# Altium PCB PCB_Lib.pcbdoc
Units mm, origin at the board's own origin, x right, y up, seen from the top; angles counter-clockwise.
Board outline 90 x 60 mm, 2 copper layers (Top Layer, Bottom Layer); 17 components, 88 nets, 128 pads, 0 vias.
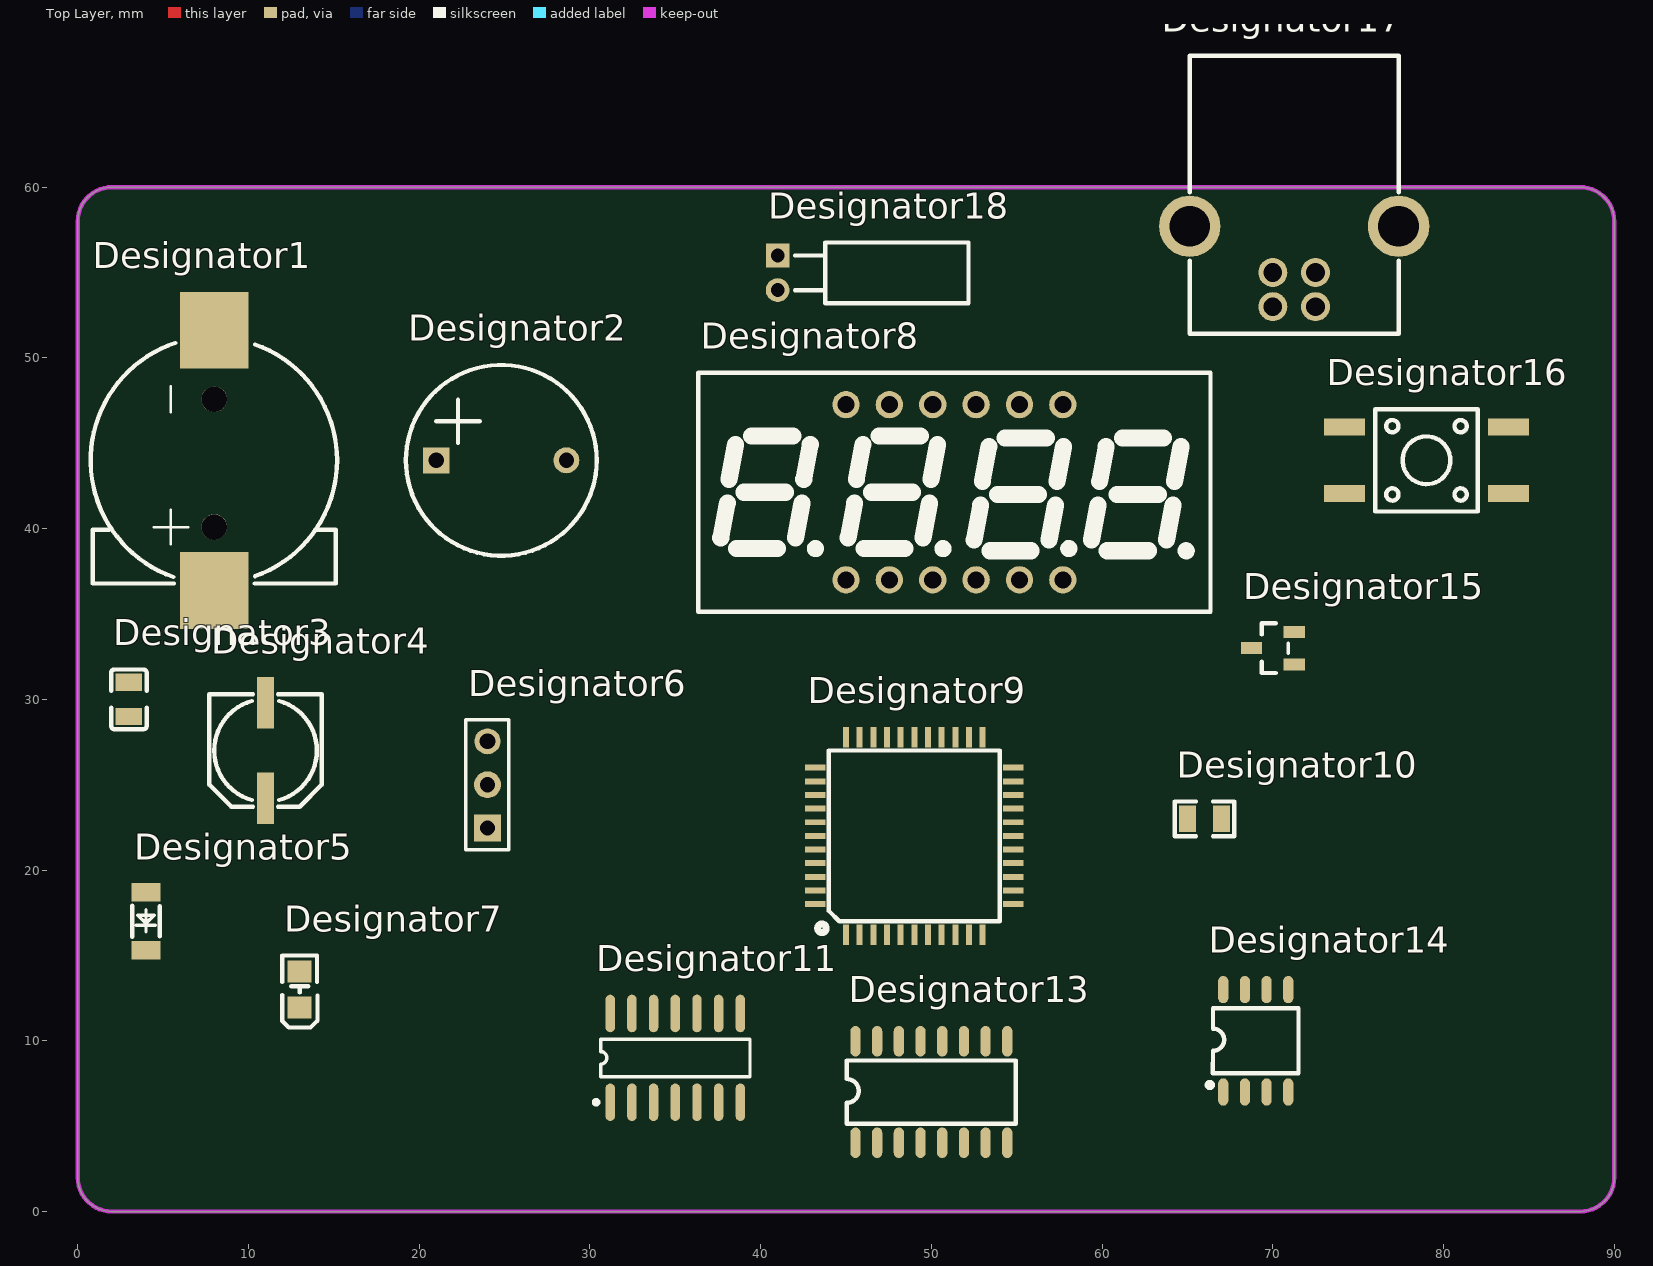
[diagram p0: Top Layer view]
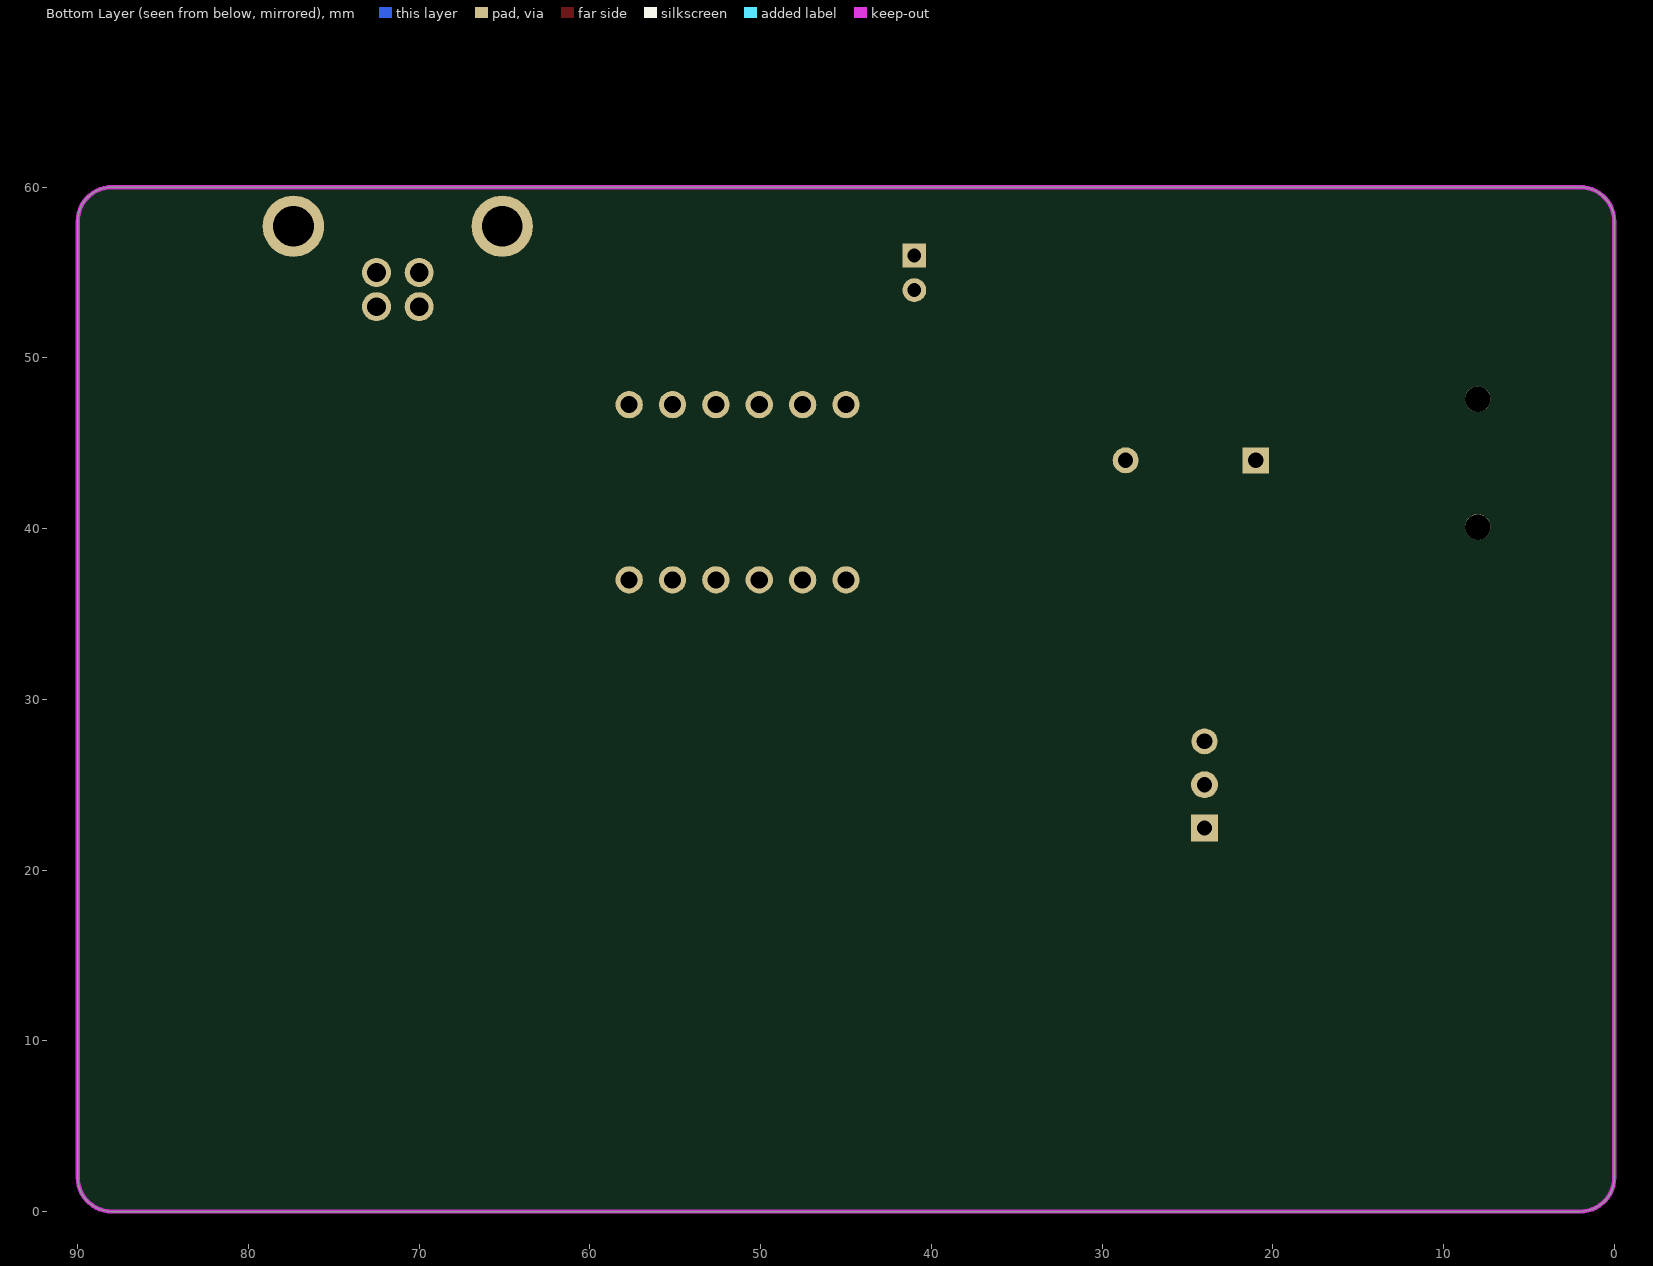
[diagram p1: Bottom Layer view, seen from below]

## Layer stack, top to bottom
Top Solder: solder mask 0.0102, Solder Resist, Dk 3.5
Top Layer: signal copper 0.0356
Dielectric1: dielectric 0.32, FR-4, Dk 4.8
Bottom Layer: signal copper 0.0356
Bottom Solder: solder mask 0.0102, Solder Resist, Dk 3.5

## Board outline
0,1.999 ccw(c2,2) 1.999,0 88.001,0 ccw(c88,2) 90,1.999 90,58 90,58.001 ccw(c88,58) 88.001,60 88,60 2,60 1.999,59.999 ccw(c2,57.999) 0,58

## Design rules (kind name [scope] priority, off if disabled: settings)
AssemblyTestPointUsage [All] p0: scope1count=1 scope1_0_kind=Board scope1_0_value=Board scope2count=1 scope2_0_kind=Board scope2_0_value=Board commentlength=0
AssemblyTestpoint [All] p0: scope1count=1 scope1_0_kind=Board scope1_0_value=Board scope2count=1 scope2_0_kind=Board scope2_0_value=Board commentlength=0
Clearance [All] p0: scope1count=1 scope1_0_kind=Board scope1_0_value=Board scope2count=1 scope2_0_kind=Board scope2_0_value=Board commentlength=0 gap=0.254
Clearance [All] p1: gap=0.254 ignorepadtopadclearanceinfootprint=FALSE except(0: Arc-Hole Track-Hole SMDPad-Hole THPad-Hole Via-Hole Fill-Hole Poly-Hole Region-Hole Text-Hole)
ComponentClearance [All] p0: scope1count=1 scope1_0_kind=Board scope1_0_value=Board scope2count=1 scope2_0_kind=Board scope2_0_value=Board commentlength=0 gap=0.254 collisioncheckmode=3
DiffPairsRouting [All] p0: scope1count=1 scope1_0_kind=Board scope1_0_value=Board scope2count=1 scope2_0_kind=Board scope2_0_value=Board commentlength=0
FabricationTestPointUsage [All] p0: scope1count=1 scope1_0_kind=Board scope1_0_value=Board scope2count=1 scope2_0_kind=Board scope2_0_value=Board commentlength=0 valid=0 allowmultiple=FALSE
FabricationTestpoint [All] p0: scope1count=1 scope1_0_kind=Board scope1_0_value=Board scope2count=1 scope2_0_kind=Board scope2_0_value=Board commentlength=0 side=3 testpointundercomponent=TRUE minsize=1.016 maxsize=2.54 preferedsize=1.524 minholesize=0 maxholesize=1.016 preferedholesize=0.813 testpointgrid=0.025
FanoutControl Fanout_BGA [All] p0 off: scope1count=1 scope1_0_kind=Board scope1_0_value=Board scope2count=1 scope2_0_kind=Board scope2_0_value=Board commentlength=69 // Protel DXP Scope 1 Expression Was: IsBGA   Fanout_BGA (Default Rule)
FanoutControl Fanout_LCC [All] p0 off: scope1count=1 scope1_0_kind=Board scope1_0_value=Board scope2count=1 scope2_0_kind=Board scope2_0_value=Board commentlength=69 // Protel DXP Scope 1 Expression Was: IsLCC   Fanout_LCC (Default Rule)
FanoutControl Fanout_SOIC [All] p0 off: scope1count=1 scope1_0_kind=Board scope1_0_value=Board scope2count=1 scope2_0_kind=Board scope2_0_value=Board commentlength=71 // Protel DXP Scope 1 Expression Was: IsSOIC   Fanout_SOIC (Default Rule)
FanoutControl Fanout_Small [All] p0 off: scope1count=1 scope1_0_kind=Board scope1_0_value=Board scope2count=1 scope2_0_kind=Board scope2_0_value=Board commentlength=84 // Protel DXP Scope 1 Expression Was: (CompPinCount < 5)   Fanout_Small (Default Rule)
FanoutControl Fanout_Default [All] p0: scope1count=1 scope1_0_kind=Board scope1_0_value=Board scope2count=1 scope2_0_kind=Board scope2_0_value=Board commentlength=30 // Fanout_Default (Default Rule)
Height [All] p0: scope1count=1 scope1_0_kind=Board scope1_0_value=Board scope2count=1 scope2_0_kind=Board scope2_0_value=Board commentlength=0
HoleSize [All] p0: scope1count=1 scope1_0_kind=Board scope1_0_value=Board scope2count=1 scope2_0_kind=Board scope2_0_value=Board commentlength=0 absolutevalues=TRUE maxlimit=2.54 minlimit=0.025 maxpercent=80.000 minpercent=20.000
HoleToHoleClearance [All] p0: scope1count=1 scope1_0_kind=Board scope1_0_value=Board scope2count=1 scope2_0_kind=Board scope2_0_value=Board commentlength=0
LayerPairs [All] p0: scope1count=1 scope1_0_kind=Board scope1_0_value=Board scope2count=1 scope2_0_kind=Board scope2_0_value=Board commentlength=0 enforce=TRUE
MinimumSolderMaskSliver [All] p0: scope1count=1 scope1_0_kind=Board scope1_0_value=Board scope2count=1 scope2_0_kind=Board scope2_0_value=Board commentlength=0
NetAntennae [All] p0: scope1count=1 scope1_0_kind=Board scope1_0_value=Board scope2count=1 scope2_0_kind=Board scope2_0_value=Board commentlength=0
PasteMaskExpansion [All] p0: scope1count=1 scope1_0_kind=Board scope1_0_value=Board scope2count=1 scope2_0_kind=Board scope2_0_value=Board commentlength=0 expansion=0
PlaneClearance [All] p0: scope1count=1 scope1_0_kind=Board scope1_0_value=Board scope2count=1 scope2_0_kind=Board scope2_0_value=Board commentlength=0 clearance=0.508
PlaneConnect [All] p0: scope1count=1 scope1_0_kind=Board scope1_0_value=Board scope2count=1 scope2_0_kind=Board scope2_0_value=Board commentlength=0 planeconnectstyle=Relief reliefexpansion=0.508 reliefentries=4 reliefconductorwidth=0.254 reliefairgap=0.254
PolygonConnect [All] p0: scope1count=1 scope1_0_kind=Board scope1_0_value=Board scope2count=1 scope2_0_kind=Board scope2_0_value=Board commentlength=0 connectstyle=Relief reliefconductorwidth=0.254 reliefentries=4 polygonreliefangle="90 Angle"
PolygonConnect [All] p1: connectstyle=Relief reliefconductorwidth=0.254 reliefentries=4 polygonreliefangle="90 Angle" airgapwidth=0.254
RoutingCorners [All] p0: scope1count=1 scope1_0_kind=Board scope1_0_value=Board scope2count=1 scope2_0_kind=Board scope2_0_value=Board commentlength=0 cornerstyle=45-Degree minsetback=2.54 maxsetback=2.54
RoutingLayers [All] p0: scope1count=1 scope1_0_kind=Board scope1_0_value=Board scope2count=1 scope2_0_kind=Board scope2_0_value=Board commentlength=0 top layer=Automatic bottom layer=Automatic
RoutingPriority [All] p0: scope1count=1 scope1_0_kind=Board scope1_0_value=Board scope2count=1 scope2_0_kind=Board scope2_0_value=Board commentlength=0
RoutingTopology [All] p0: scope1count=1 scope1_0_kind=Board scope1_0_value=Board scope2count=1 scope2_0_kind=Board scope2_0_value=Board commentlength=0 topology=Shortest
RoutingVias [All] p0: scope1count=1 scope1_0_kind=Board scope1_0_value=Board scope2count=1 scope2_0_kind=Board scope2_0_value=Board commentlength=0 holewidth=0.711 width=1.27 viastyle="Through Hole" minholewidth=0.711 minwidth=1.27 maxholewidth=0.711 maxwidth=1.27
RoutingVias [All] p1: holewidth=0.711 width=1.27 viastyle="Through Hole" minholewidth=0.711 minwidth=1.27 maxholewidth=0.711 maxwidth=1.27
ShortCircuit [All] p0: scope1count=1 scope1_0_kind=Board scope1_0_value=Board scope2count=1 scope2_0_kind=Board scope2_0_value=Board commentlength=0 allowed=FALSE
SilkToBoardRegionClearance [All] p0 off: scope1count=1 scope1_0_kind=Board scope1_0_value=Board scope2count=1 scope2_0_kind=Board scope2_0_value=Board commentlength=0
SilkToBoardRegionClearance [All] p1 off:
SilkToSilkClearance [All] p0: scope1count=1 scope1_0_kind=Board scope1_0_value=Board scope2count=1 scope2_0_kind=Board scope2_0_value=Board commentlength=0
SilkToSolderMaskClearance [All] p0 off: scope1count=1 scope1_0_kind=Board scope1_0_value=Board scope2count=1 scope2_0_kind=Board scope2_0_value=Board commentlength=44 // Protel DXP Scope 1 Expression Was: IsPad
SolderMaskExpansion [All] p0: scope1count=1 scope1_0_kind=Board scope1_0_value=Board scope2count=1 scope2_0_kind=Board scope2_0_value=Board commentlength=0 expansion=0.102
SolderMaskExpansion [All] p1: expansion=0.102 istentingtop=FALSE
UnRoutedNet [All] p0: scope1count=1 scope1_0_kind=Board scope1_0_value=Board scope2count=1 scope2_0_kind=Board scope2_0_value=Board commentlength=0
UnpouredPolygon [All] p0: scope1count=1 scope1_0_kind=Board scope1_0_value=Board scope2count=1 scope2_0_kind=Board scope2_0_value=Board commentlength=0
Width [All] p0: scope1count=1 scope1_0_kind=Board scope1_0_value=Board scope2count=1 scope2_0_kind=Board scope2_0_value=Board commentlength=0 maxlimit=0.254 minlimit=0.254 preferedwidth=0.254
Width [All] p1: maxlimit=0.254 minlimit=0.254 preferedwidth=0.254
29 further rules are at their usual default settings.

## Components (designator, comment, footprint, x,y, rotation, side; value= is the part's Value field where it differs from the comment)
Designator2 "Comment" BUZZ 21,44 r0 top
Designator3 "Comment" C0805 3,30 r90 top
Designator4 "Comment" CAP 11,27 r90 top
Designator5 "Comment" DIODE 4,17 r90 top
Designator6 "Comment" HDR-F-2.54_1X3 24,25 r90 top
Designator7 "Comment" LED0805 13,13 r90 top
Designator8 "Comment" LED-SEG 45,37 r0 top
Designator9 "Comment" LQFP-44 49,22 r0 top
Designator10 "Comment" R0805 66,23 r0 top
Designator11 "Comment" SO-14 35,9 r0 top
Designator13 "Comment" SOP-16 50,7 r0 top
Designator14 "Comment" SOP-8 69,10 r0 top
Designator15 "Comment" SOT-23-3 70,33 r0 top
Designator16 "Comment" SW-SMD_4P 79,44 r0 top
Designator17 "Comment" USB-B 70,53 r180 top
Designator18 "Comment" XTAL-DT38 41,56 r90 top
? "Comment" BAT-CR1220 8,44 r90 top

## Footprints (in the part's own frame and the unit in brackets; to place one, negate y for a bottom-side part, rotate by r counter-clockwise, add the part's x,y. Pads: shape width x height; smd on the part's side, far side on the other; paste and mask are expansions set on the pad)
BAT-CR1220 [mm]
  rect 4.5x4 smd: 1(-7.62,0) 2(7.62,0)
  round 1.5 hole 1.5 unplated: ""(-3.912,0) ""(3.581,0)
  silkscreen extent -7.22,-7.19 6.87,7.24
BUZZ [mil]
  rect 60x60 hole 35: 1(0,0)
  round 60 hole 35: 2(300,0)
  silkscreen extent -70,-220 370,220
C0805 [mm]
  rect 1x1.55 smd: 1(-1,0) 2(1,0)
  silkscreen extent -1.75,-1.04 1.75,1.04
CAP [mm]
  rect 3x1 smd: 1(-2.8,0) 2(2.8,0)
  silkscreen extent -3.3,-3.3 3.3,3.3
DIODE [mm]
  rect 1.1x1.7 smd: 1(-1.7,0) 2(1.7,0)
  silkscreen extent -0.9,-0.8 0.9,0.8
HDR-F-2.54_1X3 [mil]
  rect 62x62 hole 35: 1(-100,0)
  round 62 hole 35: 2(0,0)
  round 60 hole 36: 3(100,0)
  silkscreen extent -150,-49 150,50
LED0805 [mm]
  rect 1.3x1.4 smd: 1(1.05,0) 2(-1.05,0)
  silkscreen extent -2.22,-1.04 1.99,1.01
LED-SEG [mm]
  round 1.6 hole 1: 1(0,0) 2(2.54,0) 3(5.08,0) 4(7.62,0) 5(10.16,0) 6(12.7,0) 7(12.7,10.26) 8(10.16,10.26) 9(7.62,10.26) 10(5.08,10.26) 11(2.54,10.26) 12(0,10.26)
  silkscreen extent -8.65,-1.87 21.35,12.13
LQFP-44 [mil]
  rect 13.8x47.24 smd: 1(-157.48,-228) 2(-125.98,-228) 3(-94.49,-228) 4(-62.99,-228) 5(-31.5,-228) 6(0,-228) 7(31.5,-228) 8(62.99,-228) 9(94.49,-228) 10(125.98,-228) 11(157.48,-228) 23(157.48,228) 24(125.98,228) 25(94.49,228) 26(62.99,228) 27(31.5,228) 28(0,228) 29(-31.5,228) 30(-62.99,228) 31(-94.49,228) 32(-125.98,228) 33(-157.48,228)
  rect 47.24x13.8 smd: 12(228,-157.48) 13(228,-125.98) 14(228,-94.49) 15(228,-62.99) 16(228,-31.5) 17(228,0) 18(228,31.5) 19(228,62.99) 20(228,94.49) 21(228,125.98) 22(228,157.48) 34(-228,157.48) 35(-228,125.98) 36(-228,94.49) 37(-228,62.99) 38(-228,31.5) 39(-228,0) 40(-228,-31.5) 41(-228,-62.99) 42(-228,-94.49) 43(-228,-125.98) 44(-228,-157.48)
  silkscreen extent -223,-223 197,197
R0805 [mm]
  rect 1x1.55 smd: 1(-1,0) 2(1,0)
  silkscreen extent -1.75,-1.02 1.75,1.02
SO-14 [mm]
  oval 0.55x2.2 smd: 1(-3.81,-2.6) 2(-2.54,-2.6) 3(-1.27,-2.6) 4(0,-2.6) 5(1.27,-2.6) 6(2.54,-2.6) 7(3.81,-2.6) 8(3.81,2.6) 9(2.54,2.6) 10(1.27,2.6) 11(0,2.6) 12(-1.27,2.6) 13(-2.54,2.6) 14(-3.81,2.6)
  silkscreen extent -4.76,-2.72 4.37,1.1
SOP-8 [mm]
  oval 0.6x1.598 smd: 1(-1.905,-3) 2(-0.635,-3) 3(0.635,-3) 4(1.905,-3) 5(1.905,3) 6(0.635,3) 7(-0.635,3) 8(-1.905,3)
  silkscreen extent -2.84,-2.74 2.5,1.9
SOP-16 [mm]
  oval 0.6x1.798 smd: 1(-4.445,-2.972) 2(-3.175,-2.972) 3(-1.905,-2.972) 4(-0.635,-2.972) 5(0.635,-2.972) 6(1.905,-2.972) 7(3.175,-2.972) 8(4.445,-2.972) 9(4.445,2.972) 10(3.175,2.972) 11(1.905,2.972) 12(0.635,2.972) 13(-0.635,2.972) 14(-1.905,2.972) 15(-3.175,2.972) 16(-4.445,2.972)
  silkscreen extent -4.95,-1.85 4.95,1.85
SOT-23-3 [mm]
  rect 1.25x0.7 smd: 1(1.25,-0.95) 2(1.25,0.95) 3(-1.25,0)
  silkscreen extent -0.65,-1.46 0.9,1.46
SW-SMD_4P [mm]
  rect 2.4x1 smd: 1(-4.8,1.95) 2(4.8,1.95) 3(-4.8,-1.95) 4(4.8,-1.95)
  silkscreen extent -3,-3 3,3
USB-B [mm]
  round 1.7 hole 1.1: 1(0,0) 2(-2.5,0) 3(-2.5,-2) 4(0,-2)
  round 3.6 hole 2.4: 5(-7.366,-4.71) 5(4.866,-4.71)
  silkscreen extent -7.37,-14.7 4.87,1.59
XTAL-DT38 [mil] "晶振3x8"
  rect 55x55 hole 32: 1(0,0)
  round 55 hole 32: 2(-80,0)
  silkscreen extent -110,-440 30,-40

## Nets (pads, with @x,y where several pads share a name; then routed paths per layer and width w, separated by ;. In a path a pad name is that pad's centre, name@x,y a point inside that pad or via, vN(x,y) a via of type N, cw(c..) or ccw(c..) an arc to the next point about the centre after c; other vN are vias at no path point)
+5V: 
COM1: 
COM2: 
COM3: 
COM4: 
COM5: 
COM6: 
COM7: 
COM8: 
GND: 
NetB1_1: 
NetC3_2: 
NetD2_1: 
NetH1_2: 
NetLED1_1: 
NetLED2_1: 
NetLED3_1: 
NetLED4_1: 
NetLED5_1: 
NetLED6_1: 
NetLED7_1: 
NetLED8_1: 
NetLED9_1: 
NetQ1_1: 
NetR4_2: 
NetR5_2: 
NetR6_2: 
NetR7_2: 
NetR8_2: 
NetR9_2: 
NetR10_2: 
NetR11_1: 
NetR15_1: 
NetU4_9: 
NetU6_2: 
NetU6_3: 
P00: 
P01: 
P02: 
P03: 
P04: 
P05: 
P06: 
P07: 
P10: 
P11: 
P12: 
P13: 
P14: 
P15: 
P16: 
P17: 
P20: 
P21: 
P22: 
P23: 
P24: 
P25: 
P26: 
P27: 
P30: 
P31: 
P32: 
P33: 
P34: 
P35: 
P36: 
P37: 
P40: 
P41: 
P42: 
P43: 
P44: 
P45: 
P46: 
P47: 
P55: 
SEGA: 
SEGB: 
SEGC: 
SEGD: 
SEGDP: 
SEGE: 
SEGF: 
SEGG: 
USB_D+: 
USB_D-: 
VUSB: 
pads on no net: ?. ?.1 ?.2 Designator2.1 Designator2.2 Designator3.1 Designator3.2 Designator4.1 Designator4.2 Designator5.1 Designator5.2 Designator6.1 Designator6.2 Designator6.3 Designator7.1 Designator7.2 Designator8.1 Designator8.2 Designator8.3 Designator8.4 Designator8.5 Designator8.6 Designator8.7 Designator8.8 Designator8.9 Designator8.10 Designator8.11 Designator8.12 Designator9.1 Designator9.2 Designator9.3 Designator9.4 Designator9.5 Designator9.6 Designator9.7 Designator9.8 Designator9.9 Designator9.10 Designator9.11 Designator9.12 Designator9.13 Designator9.14 Designator9.15 Designator9.16 Designator9.17 Designator9.18 Designator9.19 Designator9.20 Designator9.21 Designator9.22 Designator9.23 Designator9.24 Designator9.25 Designator9.26 Designator9.27 Designator9.28 Designator9.29 Designator9.30 Designator9.31 Designator9.32 Designator9.33 Designator9.34 Designator9.35 Designator9.36 Designator9.37 Designator9.38 Designator9.39 Designator9.40 Designator9.41 Designator9.42 Designator9.43 Designator9.44 Designator10.1 Designator10.2 Designator11.1 Designator11.2 Designator11.3 Designator11.4 Designator11.5 Designator11.6 Designator11.7 Designator11.8 Designator11.9 Designator11.10 Designator11.11 Designator11.12 Designator11.13 Designator11.14 Designator13.1 Designator13.2 Designator13.3 Designator13.4 Designator13.5 Designator13.6 Designator13.7 Designator13.8 Designator13.9 Designator13.10 Designator13.11 Designator13.12 Designator13.13 Designator13.14 Designator13.15 Designator13.16 Designator14.1 Designator14.2 Designator14.3 Designator14.4 Designator14.5 Designator14.6 Designator14.7 Designator14.8 Designator15.1 Designator15.2 Designator15.3 Designator16.1 Designator16.2 Designator16.3 Designator16.4 Designator17.1 Designator17.2 Designator17.3 Designator17.4 Designator17.5 Designator18.1 Designator18.2

## Keep-outs
Keep-Out Layer:
  lines w0.254: 0,1.999 ccw(c2,2) 1.999,0 88.001,0 ccw(c88,2) 90,1.999 ; 0,2 0,58 cw(c2,57.999) 1.999,59.999 88,60 ; 88.001,60 cw(c88,58) 90,58.001 90,2

## Silkscreen, mask and mechanical layers (free items; w line width, h text height)
Mechanical 1:
  circle w0.254: c86,56 r1.6
  circle w0.254: c4,56 r1.6
  circle w0.254: c86,4 r1.6
  circle w0.254: c4,4 r1.6

## Text inside footprints (layer, text, board x,y; h text height)
Designator4: Top Overlay "Designator1" at 0.874,55.247 h1.52